# Altium PCB PCB1.pcbdoc
Units mm, origin at the board's own origin, x right, y up, seen from the top; angles counter-clockwise.
Board outline 136.35 x 78.36 mm, 2 copper layers (Top Layer, Bottom Layer), stack 0.07 mm thick; 18 components, 37 nets, 128 pads, 83 vias.
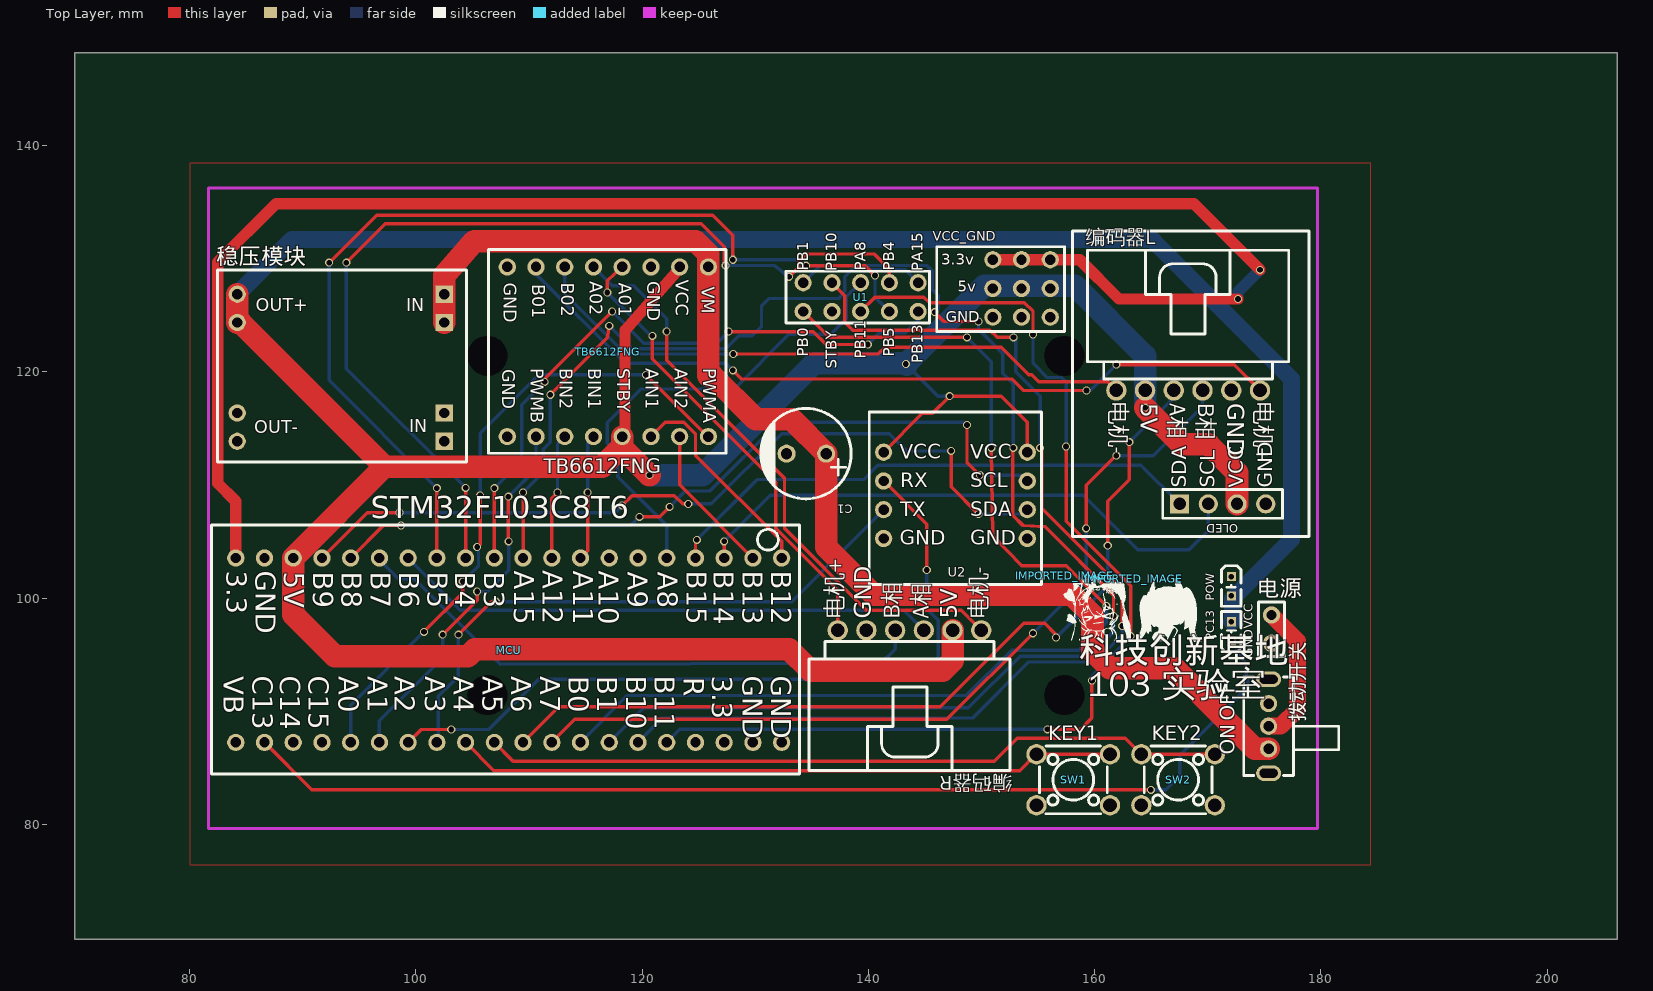
[diagram p0: Top Layer view]
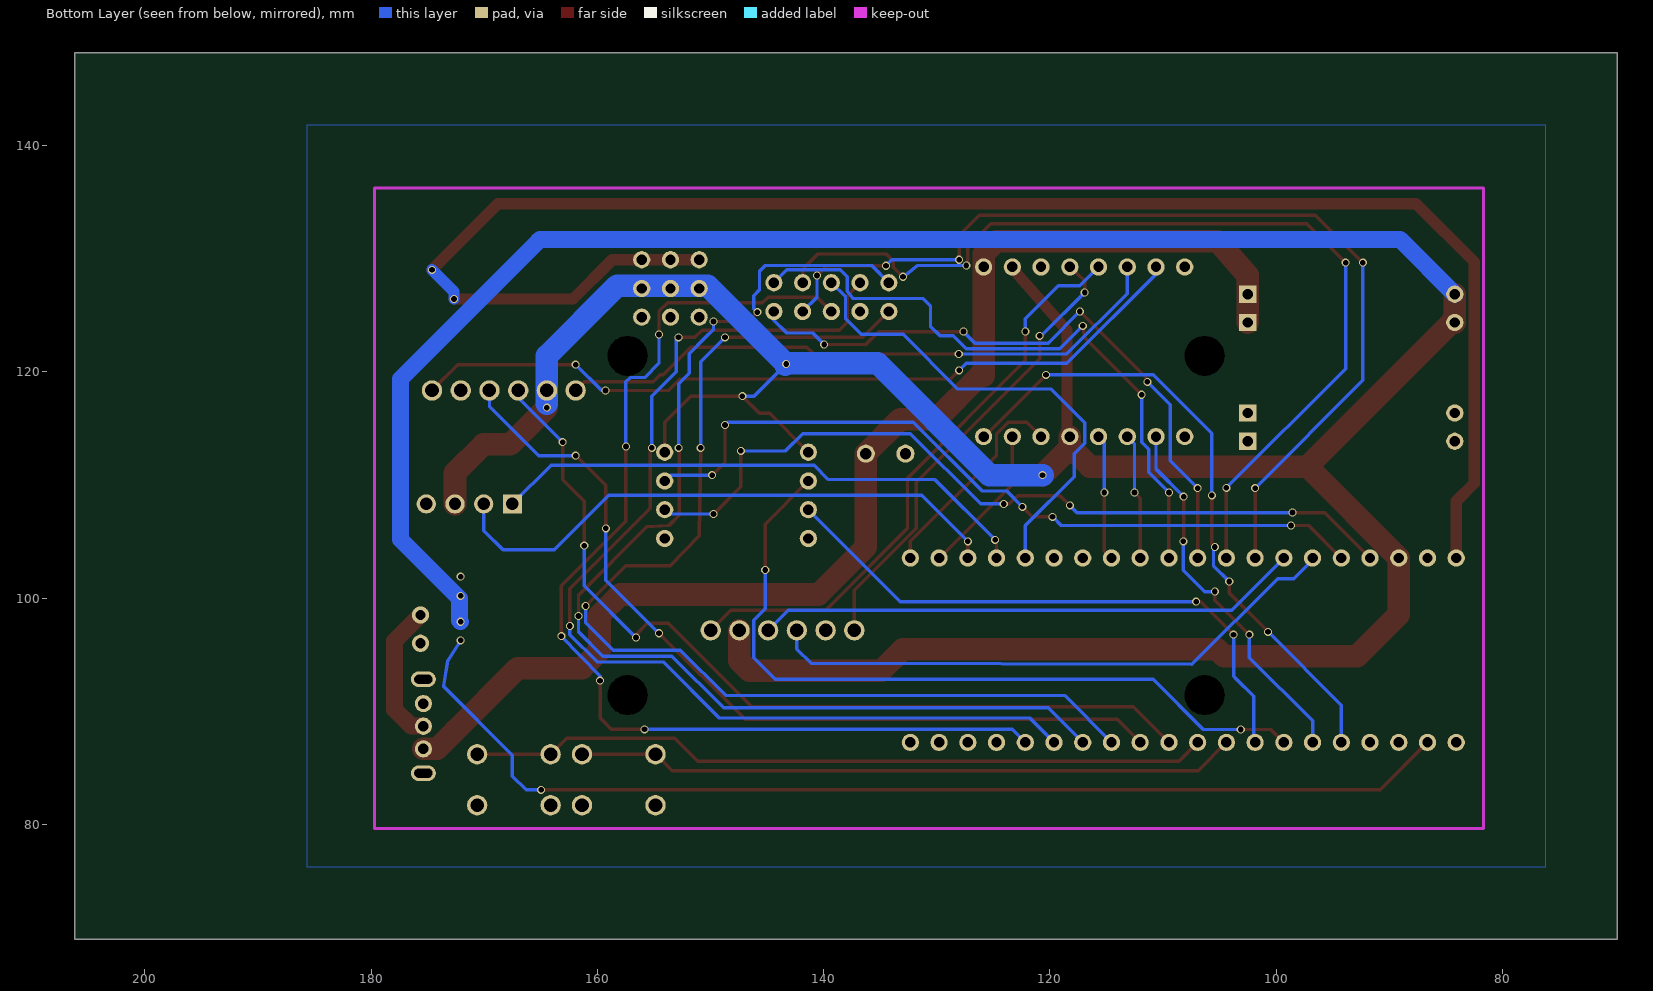
[diagram p1: Bottom Layer view, seen from below]

## Layer stack, top to bottom
Top Layer: signal copper 0.035
Bottom Layer: signal copper 0.035

## Board outline
206.197,69.85 69.85,69.85 69.85,148.209 206.197,148.209
cut-out: 108.094,121.426 ccw(c106.326,121.426) 104.558,121.426 ccw(c106.326,121.426)
cut-out: 108.094,91.426 ccw(c106.326,91.426) 104.558,91.426 ccw(c106.326,91.426)
cut-out: 159.094,91.426 ccw(c157.326,91.426) 155.558,91.426 ccw(c157.326,91.426)
cut-out: 159.094,121.426 ccw(c157.326,121.426) 155.558,121.426 ccw(c157.326,121.426)

## Components (designator, comment, footprint, x,y, rotation, side; value= is the part's Value field where it differs from the comment)
C1 "220uF" CAP-TH_BD8.0-P3.50-D0.6-FD_1 134.521,112.776 r180 top
IMPORTED_IMAGE "IMPORTED_IMAGE" IMPORTED_IMAGE 157.353,101.981 r0 top
IMPORTED_IMAGE "IMPORTED_IMAGE" IMPORTED_IMAGE 163.449,101.727 r0 top
MCU "Stm32f103c8t6" STM32F103 100.093,120.362 r270 top
OLED "OLED（4Pin）" HDR-TH_4P-P2.54-V-F 171.323,108.331 r0 top
PC13 "HL-PST-1608U51GC" LED0603-R-RD_GREEN 172.085,97.066 r90 top
POW "HL-PST-1608U51GC" LED0603-R-RD_GREEN 172.085,101.054 r270 top
SW1 "KH-6X6X5H-TJ" SW-TH_4P-L6.0-W6.0-P4.50-LS6.5 158.115,83.947 r0 top
SW2 "KH-6X6X5H-TJ" SW-TH_4P-L6.0-W6.0-P4.50-LS6.5 167.386,83.947 r0 top
TB6612FNG "TB6612fng（16PIN）" Tb6612FNg（8PIN） 117.094,123.571 r270 top
U1 "MCU剩余引脚" MCU多余引脚 147.701,112.903 r90 top
U2 "MPU6050_JY-61" MPU6050_JY-61 142.875,102.997 r0 top
VCC_GND "VCC_GND" VCC_GND 154.051,120.777 r0 top
拨动开关 "SK12D07VG4" SW-TH_SK12D07VG4 175.387,88.679 r90 top
电源 "电源" 电源 177.549,96.734 r0 top
稳压模块 "稳压模块（-5v）" 稳压模块（-5v） 91.948,122.174 r0 top
编码器L "A2547WR-6P" CONN-TH-6P_A2547WR-6P 168.402,121.793 r0 top
编码器R "A2547WR-6P" CONN-TH-6P_A2547WR-6P 143.51,93.726 r180 top

## Footprints (in the part's own frame and the unit in brackets; to place one, negate y for a bottom-side part, rotate by r counter-clockwise, add the part's x,y. Pads: shape width x height; smd on the part's side, far side on the other; paste and mask are expansions set on the pad)
CAP-TH_BD8.0-P3.50-D0.6-FD_1 [mm]
  round 1.6 hole 1: 1(-1.75,0) 2(1.75,0)
  silkscreen extent -3.96,-4 4.04,4
CONN-TH-6P_A2547WR-6P [mil]
  round 70.9 hole 47.2: 1(-255,-135) 2(-155,-135) 3(-55,-135) 4(45,-135) 5(145,-135) 6(245,-135)
  silkscreen extent -355,-96 345,353
HDR-TH_4P-P2.54-V-F [mm]
  rect 1.699x1.699 hole 1.1: 1(-3.81,0)
  round 1.699 hole 1.1: 2(-1.27,0) 3(1.27,0) 4(3.81,0)
  silkscreen extent -5.29,-1.27 5.29,1.27
IMPORTED_IMAGE [mm]
  silkscreen extent -0.12,-5.73 5.84,0
LED0603-R-RD_GREEN [mm]
  rect 0.8x0.8 smd: 1(0.851,0) 2(-0.851,0)
  silkscreen extent -1.82,-0.86 1.77,0.86
MCU多余引脚 [mil]
  round 60 hole 36: 5(490,530) 6(590,530) 7(490,430) 8(590,430) 9(490,330) 10(590,330) 11(490,230) 12(590,230) 13(490,130) 14(590,130)
  silkscreen extent 450,90 630,590
MPU6050_JY-61 [mil]
  round 60 hole 36: 1(-60,390) 2(-60,290) 3(-60,190) 4(-60,90) 5(440,390) 6(440,290) 7(440,190) 8(440,90)
  silkscreen extent -110,-70 490,530
STM32F103 [mil]
  round 60 hole 36: 1(661.93,1269.33) 2(661.93,1169.33) 3(661.93,1069.33) 4(661.93,969.33) 5(661.93,869.33) 6(661.93,769.33) 7(661.93,669.33) 8(661.93,569.33) 9(661.93,469.33) 10(661.93,369.33) 11(661.93,269.33) 12(661.93,169.33) 13(661.93,69.33) 14(661.93,-30.67) 15(661.93,-130.67) 16(661.93,-230.67) 17(661.93,-330.67) 18(661.93,-430.67) 19(661.93,-530.67) 20(661.93,-630.67) 21(1303.66,1269.33) 22(1303.66,1169.33) 23(1303.66,1069.33) 24(1303.66,969.33) 25(1303.66,869.33) 26(1303.66,769.33) 27(1303.66,669.33) 28(1303.66,569.33) 29(1303.66,469.33) 30(1303.66,369.33) 31(1303.66,269.33) 32(1303.66,169.33) 33(1303.66,69.33) 34(1303.66,-30.67) 35(1303.66,-130.67) 36(1303.66,-230.67) 37(1303.66,-330.67) 38(1303.66,-430.67) 39(1303.66,-530.67) 40(1303.66,-630.67)
  silkscreen extent 547,-716 1413,1332
SW-TH_4P-L6.0-W6.0-P4.50-LS6.5 [mm]
  round 1.8 hole 1.2: 1(-3.25,2.25) 2(3.25,2.25) 3(-3.25,-2.25) 4(3.25,-2.25)
  silkscreen extent -3,-3 3,3
SW-TH_SK12D07VG4 [mil]
  round 60 hole 36: 1(-78.7,0) 2(0,0) 3(78.7,0)
  oval 55.1x86.6 hole 31.5 slot 63 at 90 deg: 4(163.4,0) 5(-163.4,0)
  silkscreen extent -171,-244 171,87
Tb6612FNg（8PIN） [mil]
  round 60 hole 36: 1(-225,345) 2(-225,245) 3(-225,145) 4(-225,45) 5(-225,-55) 6(-225,-155) 7(-225,-255) 8(-225,-355) 9(365.55,345) 10(365.55,245) 11(365.55,145) 12(365.55,45) 13(365.55,-55) 14(365.55,-155) 15(365.55,-255) 16(365.55,-355)
  silkscreen extent -285,-420 424,407
VCC_GND [mil]
  round 60 hole 36: 1(-120,360) 2(-20,360) 3(80,360) 4(-120,260) 5(-20,260) 6(80,260) 7(-120,160) 8(-20,160) 9(80,160)
  silkscreen extent -315,110 130,405
电源 [mil]
  round 60 hole 36: 1(-75.12,70) 2(-75.12,-28.43)
  silkscreen extent -120,-75 -30,115
稳压模块（-5v） [mil]
  round 60 hole 36: 1(-305,185) 2(-305,86.57) 5(-305,-228.39) 6(-305,-326.81)
  rect 60x60 hole 36: 3(415.47,86.57) 4(415.47,185) 7(415.47,-326.81) 8(415.47,-228.39)
  silkscreen extent -373,-400 493,270

## Via types
v1: diameter 0.711, hole 0.5, Top Layer to Bottom Layer, 83 vias

## Nets (pads, with @x,y where several pads share a name; then routed paths per layer and width w, separated by ;. In a path a pad name is that pad's centre, name@x,y a point inside that pad or via, vN(x,y) a via of type N, cw(c..) or ccw(c..) an arc to the next point about the centre after c; other vN are vias at no path point)
3.3V: MCU.20 VCC_GND.1 VCC_GND.2 VCC_GND.3
5V: MCU.18 OLED.3 PC13.1 POW.1 TB6612FNG.2 TB6612FNG.12 U2.1 U2.5 VCC_GND.4 VCC_GND.5 VCC_GND.6 稳压模块.1 稳压模块.2 编码器L.2 编码器R.2
  other v1: 172.085,97.917 172.085,100.203 164.465,116.84
12V: C1.1 TB6612FNG.1 拨动开关.1 拨动开关.2 电源.1 稳压模块.3 稳压模块.4
GND: C1.2 MCU.19 MCU.21 MCU.22 OLED.4 POW.2 SW1.3 SW1.4 SW2.3 SW2.4 TB6612FNG.3 TB6612FNG.8 TB6612FNG.16 U2.4 U2.8 VCC_GND.7 VCC_GND.8 VCC_GND.9 电源.2 稳压模块.5 稳压模块.6 稳压模块.7 稳压模块.8 编码器L.5 编码器R.5
  other v1: 172.085,101.905
KEY1: MCU.32 SW1.1 SW1.2
KEY2: MCU.31 SW2.1 SW2.2
L_ENC_A: MCU.30 编码器L.3
L_ENC_B: MCU.29 编码器L.4
LED: MCU.39 PC13.2
  other v1: 172.085,96.266
LM_PWM: MCU.35 TB6612FNG.15
MLIN1: MCU.8 TB6612FNG.13
MLIN2: MCU.9 TB6612FNG.14
MLO1: TB6612FNG.7 编码器L.6
MLO2: TB6612FNG.6 编码器L.1
MPU_RX: MCU.34 U2.2
MPU_SCL: MCU.16 U2.6
MPU_SDA: MCU.17 U2.7
MPU_TX: MCU.33 U2.3
MRIN1: MCU.1 TB6612FNG.11
MRIN2: MCU.2 TB6612FNG.10
MRO1: TB6612FNG.4 编码器R.6
MRO2: TB6612FNG.5 编码器R.1
OLED_SCL: MCU.3 OLED.2
OLED_SDA: MCU.4 OLED.1
PA8: MCU.5 U1.10
PA15: MCU.10 U1.14
PB0: MCU.28 U1.5
PB1: MCU.27 U1.6
PB4: MCU.12 U1.12
PB5: MCU.13 U1.11
PB10: MCU.26 U1.8
PB11: MCU.25 U1.9
PB13: MCU.11 U1.13
R_ENC_A: MCU.14 编码器R.3
R_ENC_B: MCU.15 编码器R.4
RM_PWM: MCU.36 TB6612FNG.9
"": MCU.6 MCU.7 MCU.23 MCU.24 MCU.37 MCU.38 MCU.40 U1.7 拨动开关.3 拨动开关.4 拨动开关.5 | length 2562.3
  Top Layer w0.3: 86.614,87.249 90.805,83.058 v1(164.973,83.058) ; 91.694,103.549 95.714,107.569 v1(98.552,107.569) ; v1(92.329,129.667) 96.52,133.858 126.238,133.858 128.016,132.08 v1(128.016,129.921) ; v1(93.853,129.667) 97.282,133.096 125.222,133.096 127.254,131.064 127.254,129.54 v1(127.381,129.413) ; 94.234,103.549 97.111,106.426 v1(98.679,106.426) ; 99.314,87.249 100.457,88.392 v1(103.124,88.392) ; v1(100.711,97.028) 104.14,100.457 v1(104.14,101.473) ; 101.854,103.549 v1(101.854,109.728) ; v1(102.362,96.774) 105.41,99.822 v1(105.41,100.584) ; v1(103.759,96.774) 106.68,99.695 v1(107.061,99.695) ; 104.394,87.249 106.888,84.755 153.372,84.755 154.815,86.197 161.365,86.197 ; 104.394,103.549 v1(104.394,109.757) ; v1(105.41,104.521) 105.673,104.784 v1(105.673,109.085) ; 106.934,87.249 108.585,85.598 151.13,85.598 153.162,87.63 162.703,87.63 164.136,86.197 170.636,86.197 ; 106.934,103.549 v1(106.934,109.724) ; v1(108.169,108.973) 108.169,105.064 v1(108.204,105.029) ; 109.474,87.249 112.631,90.406 146.369,90.406 153.753,97.79 155.575,97.79 156.591,96.774 v1(156.591,96.52) ; 109.474,103.549 v1(109.474,109.347) ; v1(111.379,119.126) 111.379,119.38 v1(117.348,125.349) ; v1(111.887,117.983) 116.926,123.022 v1(117.094,124.079) ; 112.014,87.249 114.047,89.282 144.907,89.281 146.939,89.281 v1(154.559,96.901) ; 112.014,103.549 112.014,108.839 v1(112.522,109.347) ; 114.554,103.549 115.189,104.184 v1(115.189,109.347) ; v1(116.926,127.027) 116.926,128.057 118.237,129.286 ; v1(118.237,108.204) 119.104,109.071 122.831,109.071 123.571,108.331 v1(124.079,108.331) ; v1(119.761,107.188) 121.539,107.188 v1(122.428,108.077) ; v1(120.338,119.742) 125.794,114.286 125.857,114.286 ; 120.777,114.286 122.061,115.57 123.698,115.57 124.714,114.554 124.714,112.649 132.334,105.029 132.334,103.549 ; v1(120.904,123.19) 120.904,121.158 131.826,110.236 131.826,106.172 137.287,100.711 137.287,97.155 ; v1(122.174,123.571) 122.174,121.031 132.588,110.617 132.588,106.172 139.827,98.933 147.066,98.933 148.209,98.933 149.987,97.155 ; 123.317,114.286 123.317,110.026 129.794,103.549 ; 124.714,103.549 124.714,105.029 v1(124.841,105.156) ; 127.254,103.549 v1(127.254,105.029) ; v1(127.635,123.571) 135.128,123.571 136.271,122.428 v1(139.954,122.428) ; v1(128.016,120.142) 128.778,119.38 152.676,119.38 153.692,118.364 v1(159.28,118.364) ; v1(128.055,121.589) 140.893,121.589 141.478,122.174 151.765,122.174 154.178,119.761 154.432,119.761 155.067,119.126 160.274,119.126 161.163,119.126 161.925,118.364 ; v1(132.989,128.417) 133.832,129.26 133.832,129.794 134.467,130.429 140.531,130.429 141.859,129.101 141.859,127.889 ; 134.239,125.349 136.525,123.063 v1(148.717,123.063) ; v1(134.49,129.39) 139.723,129.39 v1(140.589,128.524) ; 136.779,127.889 137.917,126.751 137.917,124.387 138.606,123.698 150.749,123.698 151.384,123.063 v1(152.837,123.063) ; 139.319,125.349 140.589,126.619 144.907,126.619 145.415,126.111 153.797,126.111 154.559,125.349 v1(154.559,123.317) ; 141.351,110.363 145.161,106.553 v1(145.161,102.489) ; 141.351,112.903 144.78,116.332 145.669,116.332 v1(147.193,117.856) 151.765,117.856 154.051,115.57 154.051,112.903 ; v1(145.86,125.285) 146.684,124.46 v1(149.733,124.46) ; v1(147.32,113.03) 147.32,109.855 v1(149.733,107.442) ; v1(148.717,115.316) 148.717,112.014 v1(149.86,110.871) ; v1(150.876,113.284) 150.99,105.512 153.543,102.87 157.48,102.87 v1(161.036,99.314) ; v1(152.815,113.284) 152.781,113.25 152.781,107.315 153.67,106.426 155.626,106.299 161.671,100.254 v1(161.671,98.425) ; v1(155.186,113.284) 155.321,113.149 155.321,107.95 162.433,100.838 v1(162.433,97.536) ; v1(155.839,88.402) 158.76,88.402 159.766,89.408 v1(159.766,92.71) ; v1(157.48,113.411) 157.48,106.807 163.195,101.092 v1(163.195,96.647) ; v1(159.258,106.172) 159.258,109.982 161.874,112.598 v1(161.925,112.598) ; v1(161.163,104.648) 161.163,108.585 163.068,110.49 v1(163.068,113.792) ; v1(161.925,120.65) 172.339,120.65 174.625,118.364
  Top Layer w1: 84.074,103.549 84.074,108.566 82.472,110.168 82.472,129.716 87.63,134.874 168.783,134.874 v1(174.625,129.032) ; 118.491,113.778 118.491,123.698 123.317,129.159 ; 151.003,129.921 158.687,129.921 162.154,126.454 v1(172.682,126.454)
  Top Layer w1.5: 161.063,94.107 161.352,93.819 ; 175.387,88.679 176.436,88.679 177.927,90.17 177.927,96.226 175.641,98.512
  Top Layer w2: 84.201,126.873 84.201,124.373 84.498,124.373 97.238,111.633 ; 102.501,124.373 102.501,128.536 105.156,131.572 124.714,131.572 125.857,130.429 125.857,129.286 125.857,119.69 126.182,119.69 130.048,115.824 133.223,115.824 136.271,112.776 136.271,104.521 140.462,100.33 157.988,100.33 159.819,98.499 159.819,97.31 159.819,95.351 161.063,94.107 ; v1(120.65,110.871) 118.237,113.284 118.237,114.286 118.237,113.411 116.459,111.633 99.187,111.633 97.238,111.633 ; 147.447,97.155 147.447,94.459 146.587,93.599 134.874,93.599 133.003,95.47 105.199,95.47 104.598,94.869 92.837,94.869 89.154,98.552 89.154,103.549 97.238,111.633 ; 161.352,93.819 167.039,93.819 172.593,88.265 174.178,86.68 175.387,86.68 ; 164.465,116.84 167.703,113.602 170.078,113.602 172.593,111.087 172.593,108.331
  Bottom Layer w0.3: v1(92.329,129.667) 92.329,119.253 v1(101.854,109.728) ; v1(93.853,129.667) 93.853,120.298 v1(104.394,109.757) ; 94.234,87.249 94.234,90.551 v1(100.711,97.028) ; 96.774,87.249 96.774,89.154 102.362,94.742 v1(102.362,96.774) ; 96.774,103.549 96.774,103.378 98.425,101.727 99.866,101.727 107.45,94.143 141.097,94.234 142.367,95.504 142.367,97.155 ; v1(98.552,107.569) 109.982,107.569 117.602,107.569 v1(118.237,108.204) ; v1(98.679,106.426) 110.109,106.426 118.999,106.426 v1(119.761,107.188) ; 99.314,103.549 103.933,98.93 140.462,98.93 142.993,98.93 143.132,98.93 144.907,97.155 144.907,96.878 ; 101.854,87.249 101.981,87.376 101.981,91.313 103.568,92.9 103.759,93.091 v1(103.759,96.774) ; v1(103.124,88.392) 106.426,88.392 110.871,92.837 144.272,92.837 146.177,94.742 146.177,98.044 146.05,98.171 145.161,99.06 v1(145.161,102.489) ; v1(104.14,101.473) 105.537,102.87 105.537,104.394 v1(105.41,104.521) ; v1(105.41,100.584) 106.299,100.584 108.204,102.489 v1(108.204,105.029) ; v1(105.673,109.085) 105.673,114.563 108.839,117.729 110.871,119.761 v1@120.269,119.761 ; v1(106.934,109.724) 109.347,112.137 109.347,117.094 v1(111.379,119.126) ; v1(107.061,99.695) 133.223,99.695 141.351,107.823 ; v1(108.169,108.973) 110.617,111.421 110.617,114.286 ; v1(109.474,109.347) 111.252,111.125 111.252,113.157 111.887,113.792 v1(111.887,117.983) ; 110.617,129.286 110.617,128.651 118.491,120.777 127.381,120.777 v1(128.016,120.142) ; v1(112.522,109.347) 112.522,113.651 113.157,114.286 ; 113.157,129.286 113.157,126.923 118.491,121.589 v1(128.055,121.589) ; 114.554,87.249 118.704,91.399 148.673,91.399 152.659,95.385 158.602,95.385 161.036,97.819 v1(161.036,99.314) ; v1(115.189,109.347) 115.189,113.778 115.697,114.286 ; 115.697,129.286 117.348,127.635 119.253,127.635 122.174,124.714 v1(122.174,123.571) ; v1(116.926,127.027) 120.763,123.19 v1(120.904,123.19) ; 117.094,87.249 120.142,90.297 148.844,90.297 153.416,94.869 159.512,94.869 161.671,97.028 v1(161.671,98.425) ; v1(117.094,124.079) 119.126,122.047 122.555,122.047 127.381,122.047 128.524,123.19 128.778,123.19 129.711,123.19 130.556,124.035 130.556,125.857 131.191,126.492 137.414,126.492 137.922,127.127 137.917,128.425 138.524,129.032 143.256,129.032 144.399,127.889 ; v1(117.348,125.349) 120.142,122.555 122.428,122.555 126.619,122.555 v1(127.635,123.571) ; 119.634,87.249 121.793,89.408 149.225,89.408 154.178,94.361 160.02,94.361 162.433,96.774 v1(162.433,97.536) ; 122.174,87.249 123.327,88.402 149.864,88.402 v1(155.839,88.402) ; 122.174,103.549 122.174,106.426 117.856,110.744 117.856,112.778 116.926,113.708 116.926,115.529 119.888,118.491 128.143,118.491 132.969,123.317 136.668,123.317 138.065,124.714 138.065,126.635 139.319,127.889 ; v1(122.428,108.077) 123.825,109.474 125.984,109.474 132.061,115.551 143.382,115.551 148.482,115.551 v1(148.717,115.316) ; v1(124.079,108.331) 126.111,108.331 132.334,114.554 141.839,114.554 143.382,113.011 147.301,113.011 v1(147.32,113.03) ; v1(124.841,105.156) 130.156,110.471 139.573,110.49 140.843,111.76 164.084,111.76 167.513,108.331 ; v1(127.254,105.029) 131.318,109.093 159.004,109.093 163.83,104.267 168.346,104.267 170.053,105.974 170.053,108.331 ; v1(127.381,129.413) 131.699,129.413 v1@132.969,128.397 ; v1(128.016,129.921) 133.959,129.921 v1(134.49,129.39) ; 134.239,127.889 135.763,129.413 145.161,129.413 145.669,128.905 145.669,127.254 146.177,126.746 146.177,125.602 v1(145.86,125.285) ; v1(139.954,122.428) 140.97,123.444 143.256,123.444 144.399,124.587 144.399,125.349 ; v1(140.589,128.524) 140.589,126.619 141.859,125.349 ; v1(143.309,120.704) 146.157,117.856 v1(147.193,117.856) ; v1(148.717,123.063) 150.876,120.904 v1(150.876,113.284) ; v1(149.733,107.442) 153.67,107.442 154.051,107.823 ; v1(149.733,124.46) 149.733,123.774 150.444,123.063 151.88,121.627 151.88,119.9 152.815,118.965 v1(152.815,113.284) ; v1(149.86,110.871) 153.543,110.871 154.051,110.363 ; v1(152.837,123.063) 153.035,122.865 153.035,120.015 155.186,117.864 v1(155.186,113.284) ; v1(154.559,96.901) 159.258,101.6 v1(159.258,106.172) ; v1(154.559,123.317) 154.559,120.777 155.829,119.507 157.099,119.507 157.48,119.126 157.48,118.999 v1(157.48,113.411) ; v1(156.591,96.52) 161.163,101.092 v1(161.163,104.648) ; v1(159.28,118.364) 159.639,118.364 v1(161.925,120.65) ; v1(159.766,92.71) 159.766,93.091 v1(163.195,96.647) ; v1@161.874,112.598 165.151,112.598 165.176,112.598 169.545,116.967 169.545,118.364 ; v1(163.068,113.792) 167.005,117.729 167.005,118.364 ; v1(164.973,83.058) 166.298,83.058 167.513,84.273 167.513,86.106 173.609,92.202 173.228,94.488 172.085,96.266
  Bottom Layer w1: v1(172.682,126.454) 172.682,127.089 v1(174.625,129.032)
  Bottom Layer w1.5: 84.201,126.873 89.027,131.699 165.1,131.699 165.608,131.191 177.419,119.38 177.419,106.426 177.419,105.198 172.187,99.966 172.187,98.019 172.085,97.917
  Bottom Layer w2: v1(120.65,110.871) 125.333,110.871 135.239,120.777 143.236,120.777 v1@143.382,120.631 ; v1@143.509,120.885 150.259,127.635 158.242,127.635 164.465,121.412 164.465,118.364 164.465,117.206

## Polygon pours and split planes (outlines as drawn)
GND on Top Layer (hatched 45Degree grid 30 track 10, remove dead copper, pour order 0): 80.01,76.447 184.411,76.447 184.411,138.43 80.01,138.43
GND on Bottom Layer (solid, remove dead copper, pour order 1): 76.2,76.2 185.674,76.2 185.674,141.859 76.2,141.859

## Keep-outs
Keep-Out Layer:
  lines w0.254 net "": 81.661,79.629 179.705,79.629 179.705,136.271 81.661,136.271 81.661,79.629

## Silkscreen, mask and mechanical layers (free items; w line width, h text height)
Top Silkscreen Layer:
  lines w0.254 net "": 158.039,105.461 178.943,105.461 178.943,132.461 158.039,132.461 158.039,105.461
  text "科技创新基地" at 158.643,94.271 h2.27
  text "103 实验室" at 159.41,91.35 h2.27
  text "OFF" at 172.403,89.17 h1.3 r90
  text "KEY1" at 155.915,87.439 h1.3
  text "KEY2" at 165.059,87.439 h1.3
  text "ON" at 172.403,86.179 h1.3 r90
Mechanical 1:
  circle w0.025 net "": c106.326,121.426 r1.768
  circle w0.025 net "": c106.326,91.426 r1.768
  circle w0.025 net "": c157.326,91.426 r1.768
  circle w0.025 net "": c157.326,121.426 r1.768

## Text inside footprints (layer, text, board x,y; h text height)
MCU: Top Silkscreen Layer "B8" at 93.447,102.353 h1.78 r270; Top Silkscreen Layer "B9" at 90.907,102.353 h1.78 r270; Top Silkscreen Layer "5V" at 88.367,102.353 h1.78 r270; Top Silkscreen Layer "GND" at 85.827,102.431 h1.78 r270; Top Silkscreen Layer "3.3" at 83.287,102.431 h1.78 r270; Top Silkscreen Layer "A0" at 93.193,93.082 h1.78 r270; Top Silkscreen Layer "C15" at 90.526,93.16 h1.78 r270; Top Silkscreen Layer "C14" at 87.986,93.16 h1.78 r270; Top Silkscreen Layer "C13" at 85.573,93.16 h1.78 r270; Top Silkscreen Layer "VB" at 83.033,93.082 h1.78 r270; Top Silkscreen Layer "B12" at 131.42,102.431 h1.78 r270; Top Silkscreen Layer "B13" at 128.88,102.431 h1.78 r270; Top Silkscreen Layer "B15" at 123.927,102.431 h1.78 r270; Top Silkscreen Layer "A8" at 121.387,102.353 h1.78 r270; Top Silkscreen Layer "A9" at 118.72,102.353 h1.78 r270; Top Silkscreen Layer "A10" at 116.18,102.431 h1.78 r270; Top Silkscreen Layer "A11" at 113.894,102.431 h1.78 r270; Top Silkscreen Layer "A15" at 108.687,102.431 h1.78 r270; Top Silkscreen Layer "GND" at 131.42,93.16 h1.78 r270; Top Silkscreen Layer "GND" at 128.88,93.16 h1.78 r270; Top Silkscreen Layer "3.3" at 126.213,93.16 h1.78 r270; Top Silkscreen Layer "R" at 123.667,93.008 h1.8 r270; Top Silkscreen Layer "B11" at 121.133,93.16 h1.78 r270; Top Silkscreen Layer "B10" at 118.593,93.16 h1.78 r270; Top Silkscreen Layer "B1" at 116.053,93.082 h1.78 r270; Top Silkscreen Layer "B0" at 113.513,93.082 h1.78 r270; Top Silkscreen Layer "A6" at 108.433,93.082 h1.78 r270; Top Silkscreen Layer "A12" at 111.204,102.48 h1.78 r270; Top Silkscreen Layer "A7" at 110.973,93.082 h1.78 r270; Top Silkscreen Layer "B14" at 126.34,102.431 h1.78 r270; Top Silkscreen Layer "B3" at 106.02,102.353 h1.78 r270; Top Silkscreen Layer "B4" at 103.48,102.353 h1.78 r270; Top Silkscreen Layer "B5" at 101.067,102.353 h1.78 r270; Top Silkscreen Layer "B6" at 98.527,102.353 h1.78 r270; Top Silkscreen Layer "B7" at 95.987,102.353 h1.78 r270; Top Silkscreen Layer "A5" at 105.893,93.082 h1.78 r270; Top Silkscreen Layer "A4" at 103.353,93.082 h1.78 r270; Top Silkscreen Layer "A3" at 100.813,93.082 h1.78 r270; Top Silkscreen Layer "A2" at 98.146,93.082 h1.78 r270; Top Silkscreen Layer "A1" at 95.733,93.082 h1.78 r270; Top Silkscreen Layer "STM32F103C8T6" at 96.007,107.069 h1.98
OLED: Top Silkscreen Layer "VCC" at 173.165,109.744 h1.3 r90; Top Silkscreen Layer "SCL" at 170.625,109.744 h1.3 r90; Top Silkscreen Layer "SDA" at 168.085,109.744 h1.3 r90; Top Silkscreen Layer "GND" at 175.705,109.744 h1.3 r90
TB6612FNG: Top Silkscreen Layer "PWMB" at 110.165,120.306 h1.13 r270; Top Silkscreen Layer "B01" at 110.292,127.749 h1.13 r270; Top Silkscreen Layer "GND" at 107.752,127.876 h1.13 r270; Top Silkscreen Layer "GND" at 107.625,120.256 h1.13 r270; Top Silkscreen Layer "BIN2" at 112.705,120.306 h1.13 r270; Top Silkscreen Layer "VM" at 125.278,127.511 h1.13 r270; Top Silkscreen Layer "VCC" at 122.992,128.13 h1.13 r270; Top Silkscreen Layer "GND" at 120.452,128.003 h1.13 r270; Top Silkscreen Layer "A01" at 117.912,127.876 h1.13 r270; Top Silkscreen Layer "A02" at 115.372,128.003 h1.13 r270; Top Silkscreen Layer "B02" at 112.832,127.876 h1.13 r270; Top Silkscreen Layer "PWMA" at 125.405,120.306 h1.13 r270; Top Silkscreen Layer "AIN2" at 122.865,120.306 h1.13 r270; Top Silkscreen Layer "AIN1" at 120.325,120.306 h1.13 r270; Top Silkscreen Layer "STBY" at 117.785,120.306 h1.13 r270; Top Silkscreen Layer "BIN1" at 115.245,120.306 h1.13 r270
U1: Top Silkscreen Layer "PB0" at 134.668,121.329 h0.97 r90; Top Silkscreen Layer "STBY" at 137.208,120.27 h0.97 r90; Top Silkscreen Layer "PB11" at 139.748,121.159 h0.97 r90; Top Silkscreen Layer "PB5" at 142.288,121.329 h0.97 r90; Top Silkscreen Layer "PB13" at 144.828,120.778 h0.97 r90; Top Silkscreen Layer "PB1" at 134.668,128.949 h0.97 r90; Top Silkscreen Layer "PB10" at 137.208,128.906 h0.97 r90; Top Silkscreen Layer "PA8" at 139.748,128.949 h0.97 r90; Top Silkscreen Layer "PB4" at 142.288,128.949 h0.97 r90; Top Silkscreen Layer "PA15" at 144.828,128.906 h0.97 r90
U2: Top Silkscreen Layer "VCC" at 142.764,112.331 h1.3; Top Silkscreen Layer "RX" at 142.821,109.791 h1.3; Top Silkscreen Layer "TX" at 142.821,107.251 h1.3; Top Silkscreen Layer "GND" at 142.764,104.711 h1.3; Top Silkscreen Layer "VCC" at 148.987,112.331 h1.3; Top Silkscreen Layer "SCL" at 148.987,109.791 h1.3; Top Silkscreen Layer "SDA" at 148.987,107.251 h1.3; Top Silkscreen Layer "GND" at 148.987,104.711 h1.3
VCC_GND: Top Silkscreen Layer "3.3v" at 146.432,129.492 h0.97; Top Silkscreen Layer "5v" at 147.915,127.079 h0.97; Top Silkscreen Layer "GND" at 146.856,124.412 h0.97
电源: Top Silkscreen Layer "VCC" at 173.981,97.303 h0.78 r90; Top Silkscreen Layer "GND" at 173.981,94.763 h0.78 r90
稳压模块: Top Silkscreen Layer "IN" at 99.14,125.356 h1.13; Top Silkscreen Layer "IN" at 99.394,114.688 h1.13; Top Silkscreen Layer "OUT+" at 85.832,125.356 h1.13; Top Silkscreen Layer "OUT-" at 85.705,114.561 h1.13
编码器L: Top Silkscreen Layer "电机-" at 161.435,117.346 h1.47 r270; Top Silkscreen Layer "5V" at 164.102,117.223 h1.47 r270; Top Silkscreen Layer "A相" at 166.642,117.223 h1.47 r270; Top Silkscreen Layer "B相" at 169.182,117.223 h1.47 r270; Top Silkscreen Layer "GND" at 171.722,117.219 h1.47 r270; Top Silkscreen Layer "电机+" at 174.262,117.346 h1.47 r270
编码器R: Top Silkscreen Layer "电机+" at 137.706,98.197 h1.47 r90; Top Silkscreen Layer "GND" at 140.246,98.197 h1.47 r90; Top Silkscreen Layer "B相" at 142.786,98.193 h1.47 r90; Top Silkscreen Layer "A相" at 145.326,98.193 h1.47 r90; Top Silkscreen Layer "5V" at 147.866,98.193 h1.47 r90; Top Silkscreen Layer "电机-" at 150.406,98.197 h1.47 r90